# Altium PCB TESTER_REMOTE_02.PcbDoc (part 1 of 2)
Units mil, origin at the board's own origin, x right, y up, seen from the top; angles counter-clockwise.
Board outline 6191.28 x 3341.28 mil, 2 copper layers (Top Layer, Bottom Layer); 123 components, 81 nets, 444 pads, 73 vias.
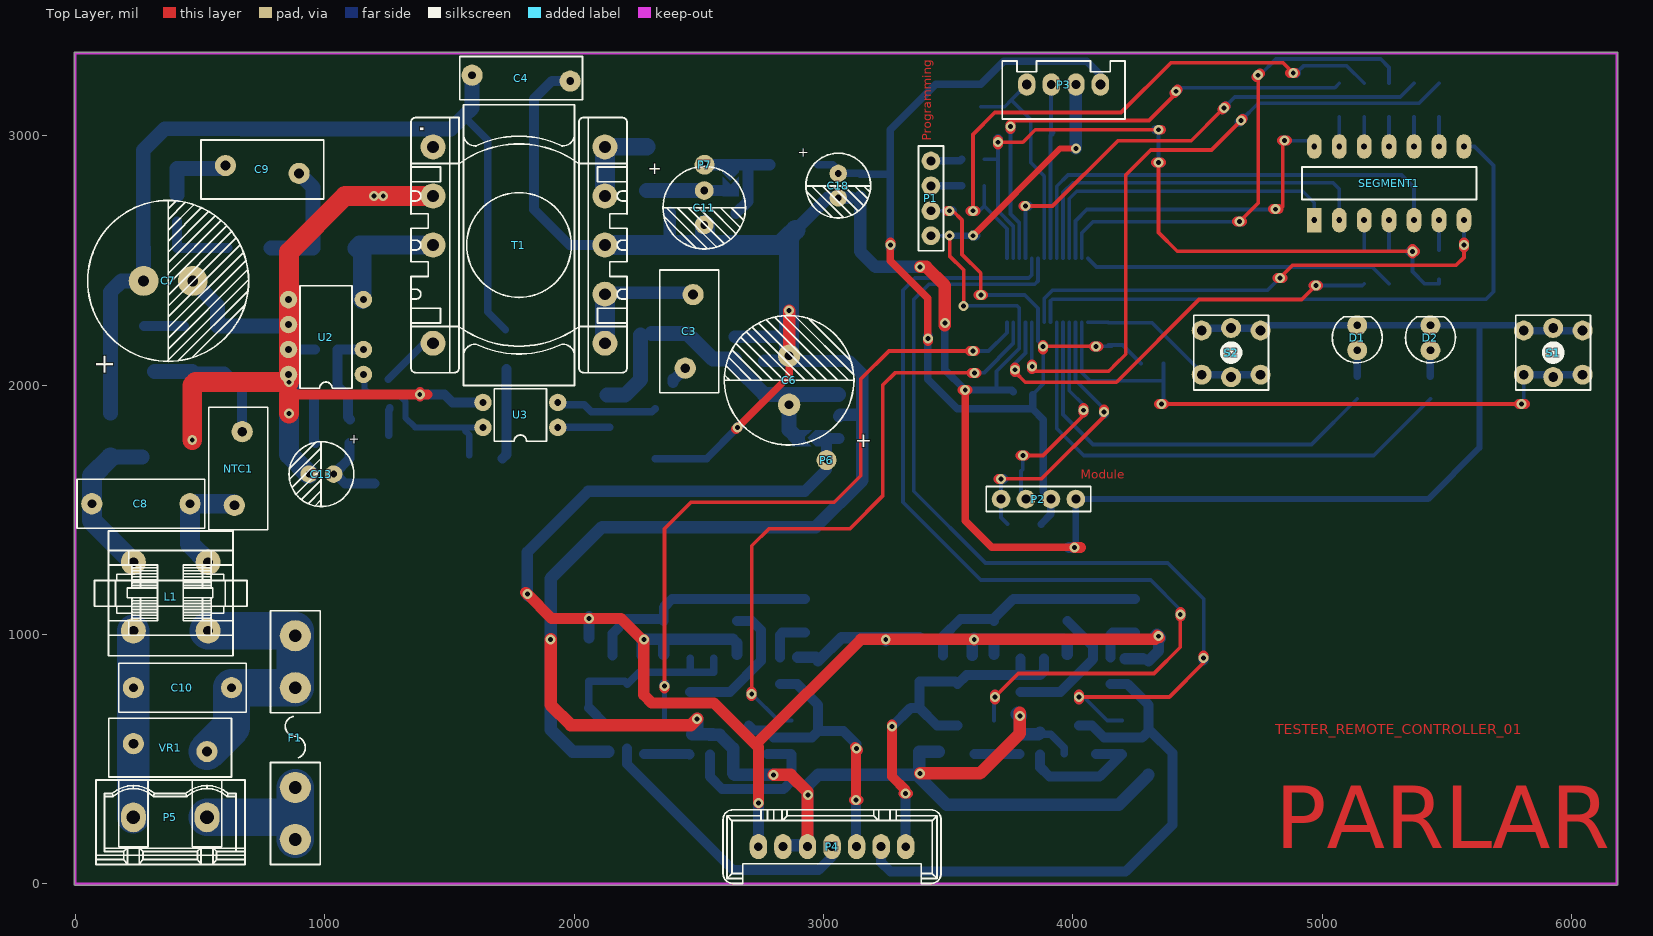
[diagram p0: Top Layer view]
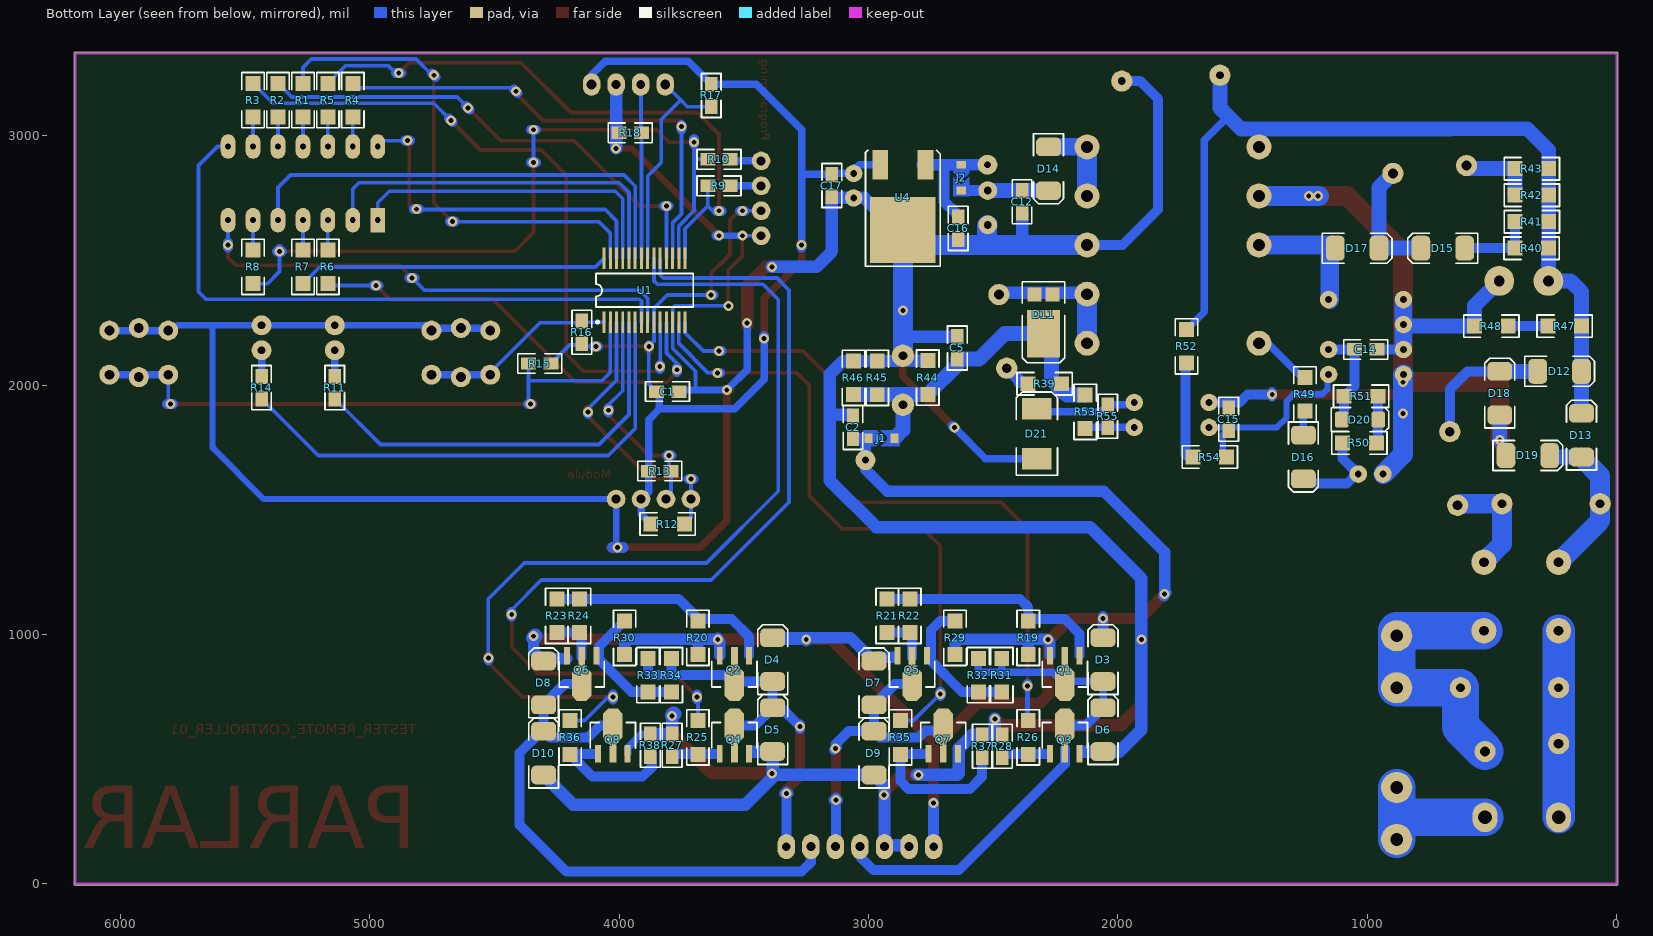
[diagram p1: Bottom Layer view, seen from below]

## Layer stack, top to bottom
Top Solder: solder mask 0.4, Solder Resist, Dk 3.5
Top Layer: signal copper 1.4
Dielectric 1: dielectric 12.6, FR-4, Dk 4.8
Bottom Layer: signal copper 1.4
Bottom Solder: solder mask 0.4, Solder Resist, Dk 3.5

## Board outline
-5.02,0 -5.02,3331.25 cw(c0,3331.25) 0,3336.26 6181.25,3336.26 cw(c6181.25,3331.25) 6186.26,3331.25 6186.26,0 cw(c6181.25,0) 6181.25,-5.01 0,-5.01 cw(c0,0)

## Design rules (kind name [scope] priority, off if disabled: settings)
AssemblyTestPointUsage [All] p1 off:
AssemblyTestpoint [All] p1 off: testpointundercomponent=TRUE minsize=40 maxsize=100 preferedsize=60 minholesize=0 maxholesize=40 preferedholesize=32 testpointgrid=1 usegrid=TRUE gridtolerance=0.01 allowsidetop=TRUE allowsidebottom=TRUE
Clearance Keep [OnLayer('Keep-Out Layer')] p1: gap=10 ignorepadtopadclearanceinfootprint=FALSE except(0: Arc-Hole Track-Hole SMDPad-Hole THPad-Hole Via-Hole Fill-Hole Poly-Hole Region-Hole Text-Hole)
Clearance "OTHER - OTHER" [NOT((InNetClass('220') OR InNetClass('Hline') OR InNetClass('HVDC') OR InNetClass('MV') OR InNet('DCLINK-'))) vs NOT((InNetClass('220') OR InNetClass('Hline') OR InNetClass('HVDC') OR InNetClass('MV') OR InNet('DCLINK-')))] p2: gap=10 ignorepadtopadclearanceinfootprint=FALSE
Clearance "DCL- - OTHER" [InNet('DCLINK-') vs NOT((InNetClass('220') OR InNetClass('Hline') OR InNetClass('HVDC') OR InNetClass('MV') OR InNet('DCLINK-')))] p3: gap=150 ignorepadtopadclearanceinfootprint=FALSE except(0: Arc-Hole Track-Hole SMDPad-Hole THPad-Hole Via-Hole Fill-Hole Poly-Hole Region-Hole Text-Hole)
Clearance MV-OTHER [InNetClass('MV') vs NOT((InNetClass('220') OR InNetClass('Hline') OR InNetClass('HVDC') OR InNetClass('MV') OR InNet('DCLINK-')))] p4: gap=150 ignorepadtopadclearanceinfootprint=FALSE except(0: Arc-Hole Track-Hole SMDPad-Hole THPad-Hole Via-Hole Fill-Hole Poly-Hole Region-Hole Text-Hole)
Clearance MV-DCL- [InNetClass('MV') vs InNet('DCLINK-')] p5: gap=35 ignorepadtopadclearanceinfootprint=FALSE except(0: Arc-Hole Track-Hole SMDPad-Hole THPad-Hole Via-Hole Fill-Hole Poly-Hole Region-Hole Text-Hole)
Clearance MV-MV [InNetClass('MV') vs InNetClass('MV')] p6: gap=25 ignorepadtopadclearanceinfootprint=FALSE except(0: Arc-Hole Track-Hole SMDPad-Hole THPad-Hole Via-Hole Fill-Hole Poly-Hole Region-Hole Text-Hole)
Clearance HLINE-OTHER [InNetClass('Hline') vs NOT((InNetClass('220') OR InNetClass('Hline') OR InNetClass('HVDC') OR InNetClass('MV') OR InNet('DCLINK-')))] p7: gap=150 ignorepadtopadclearanceinfootprint=FALSE except(0: Arc-Hole Track-Hole SMDPad-Hole THPad-Hole Via-Hole Fill-Hole Poly-Hole Region-Hole Text-Hole)
Clearance HLINE-MV [InNetClass('Hline') vs InNetClass('MV')] p8: gap=35 ignorepadtopadclearanceinfootprint=FALSE except(0: Arc-Hole Track-Hole SMDPad-Hole THPad-Hole Via-Hole Fill-Hole Poly-Hole Region-Hole Text-Hole)
Clearance HLINE-HLINE,DCL- [InNetClass('Hline') vs (InNetClass('Hline') OR InNet('DCLINK-'))] p9: gap=25 ignorepadtopadclearanceinfootprint=FALSE except(0: Arc-Hole Track-Hole SMDPad-Hole THPad-Hole Via-Hole Fill-Hole Poly-Hole Region-Hole Text-Hole)
Clearance 220-OTHER [InNetClass('220') vs NOT((InNetClass('220') OR InNetClass('Hline') OR InNetClass('HVDC') OR InNetClass('MV') OR InNet('DCLINK-')))] p10: gap=150 ignorepadtopadclearanceinfootprint=FALSE except(0: Arc-Hole Track-Hole SMDPad-Hole THPad-Hole Via-Hole Fill-Hole Poly-Hole Region-Hole Text-Hole)
Clearance 220-220,HVDC,MV,HLINE [InNetClass('220') vs (InNetClass('220') OR InNetClass('Hline') OR InNetClass('HVDC') OR InNetClass('MV') OR InNet('DCLINK-'))] p11: gap=100 ignorepadtopadclearanceinfootprint=FALSE except(0: Arc-Hole Track-Hole SMDPad-Hole THPad-Hole Via-Hole Fill-Hole Poly-Hole Region-Hole Text-Hole)
Clearance HVDC-OTHER [InNetClass('HVDC') vs NOT(InNetClass('220') OR InNetClass('Hline') OR InNetClass('HVDC') OR InNetClass('MV') OR InNet('DCLINK-'))] p12: gap=150 ignorepadtopadclearanceinfootprint=FALSE except(0: Arc-Hole Track-Hole SMDPad-Hole THPad-Hole Via-Hole Fill-Hole Poly-Hole Region-Hole Text-Hole)
Clearance HVDC-220,HLINE,MV,DCL- [InNetClass('HVDC') vs ((InNetClass('220') OR InNetClass('Hline') OR InNetClass('MV') OR InNet('DCLINK-')))] p13: gap=75 ignorepadtopadclearanceinfootprint=FALSE except(0: Arc-Hole Track-Hole SMDPad-Hole THPad-Hole Via-Hole Fill-Hole Poly-Hole Region-Hole Text-Hole)
Clearance HVDC-HVDC [InNetClass('HVDC') vs InNetClass('HVDC')] p14: gap=60 ignorepadtopadclearanceinfootprint=FALSE except(0: Arc-Hole Track-Hole SMDPad-Hole THPad-Hole Via-Hole Fill-Hole Poly-Hole Region-Hole Text-Hole)
Clearance Clearance_9 [InPolygon] p15: gap=20 ignorepadtopadclearanceinfootprint=FALSE except(0: Arc-Hole Track-Hole SMDPad-Hole THPad-Hole Via-Hole Fill-Hole Poly-Hole Region-Hole Text-Hole)
ComponentClearance [All] p1 off: gap=10 collisioncheckmode=3 verticalgap=10 showdistances=FALSE
FabricationTestPointUsage TestPointUsage [All] p1 off: valid=0 allowmultiple=FALSE
FabricationTestpoint Testpoint [All] p1 off: side=3 testpointundercomponent=TRUE minsize=40 maxsize=100 preferedsize=60 minholesize=0 maxholesize=40 preferedholesize=32 testpointgrid=1 allowsidetop=TRUE allowsidebottom=TRUE usegrid=TRUE gridtolerance=0.01
Height [All] p1 off: minheight=0 maxheight=3937.01 prefheight=500
HoleSize [All] p1 off: absolutevalues=TRUE maxlimit=275.59 minlimit=0 maxpercent=80.000 minpercent=20.000
HoleToHoleClearance [All] p1 off: gap=10 allowstackedmicrovias=TRUE
LayerPairs [All] p1 off: enforce=TRUE
MinimumSolderMaskSliver [All] p1 off: minsoldermaskwidth=10
NetAntennae [All] p1 off: netantennaetolerance=0
PolygonConnect [All] p1: connectstyle=Direct reliefconductorwidth=10 reliefentries=4 polygonreliefangle="90 Angle" airgapwidth=10
RoutingVias [All] p1: holewidth=28 width=50 viastyle="Through Hole" minholewidth=0 minwidth=0 maxholewidth=100 maxwidth=200
SilkToSilkClearance [All] p1 off: silktosilkclearance=10
SilkToSolderMaskClearance [IsPad] p1 off: minsilkscreentomaskgap=10 clearancetoexposedcopper=TRUE
SolderMaskExpansion [All] p1: expansion=4
Width [All] p1: maxlimit=500 minlimit=8 preferedwidth=15
17 further rules are at their usual default settings.

## Classes and differential pairs
net class MV: NetC9_1 NetC9_2 NetD15_1 NetR47_1 NetR52_1
net class HVDC: DCLINK+ DRAIN
net class Hline: BIAS BP/M EN/UV NetD16_1 NetD20_2 NetR49_2
net class 220: NetC8_1 NetC8_2 NetD12_1 NULL PHASE PHASE_IN
component class TESTER_REMOTE_SWITCHING_02: C3 C4 C5 C6 C7 C8 C9 C10 C11 C12 C13 C14 C15 C16 C17 C18 C? D11 D12 D13 D14 D15 D16 D17 D18 D19 D20 D21 D? DZ2 F1 J1 J2 J? L1 NTC1 P5 P6 P7 P8 P10 P11 P12 P? R39 R40 R41 R42 R43 R44 R45 R46 R47 R48 R49 R50 R51 R52 R53 R54 R55 R? SW1 T1 U2 U3 U4 U5 U? VR1
component class TESTER_REMOTE_STEPPER_DRIVER_02: C2 D3 D4 D5 D6 D7 D8 D9 D10 P4 Q1 Q2 Q3 Q4 Q5 Q6 Q7 Q8 R19 R20 R21 R22 R23 R24 R25 R26 R27 R28 R29 R30 R31 R32 R33 R34 R35 R36 R37 R38
component class TESTER_REMOTE_CONTROLLER_02: C1 D1 D2 P1 P2 P3 R1 R2 R3 R4 R5 R6 R7 R8 R9 R10 R11 R12 R13 R14 R15 R16 R17 R18 S1 S2 SEGMENT1 U1

## Components (designator, comment, footprint, x,y, rotation, side; value= is the part's Value field where it differs from the comment)
C1 "100nF" "SMD 0805" 3806.25,1975 r180 bottom
C2 "100nF" "SMD 0805" 3062.5,1831.25 r90 bottom
C3 "27pF-CP-1KV" "VDR D10 P7.5" 2445.93,2068.75 r270 top
C4 "2.2nF-X1Y1-250VAC" "VDR D10 P10" 1984.6,3220.13 r0 top
C5 "100nF" "SMD 0805" 2643.75,2150 r90 bottom
C6 "1000uF-35V" "CAP EL D13 P5" 2862.5,1921.9 r90 top
C7 "22uF-400V" "CAP EL D16 P5" 372.15,2418.75 r0 top
C8 "100nF-MKP-X2-305VAC" "CAP RAD X13 Y5 P10" 459.65,1525 r180 top
C9 "10nF-CP-1KV" "VDR D10 P7.5" 601.87,2881.5 r180 top
C10 "100nF-MKP-X2-305VAC" "CAP RAD X13 Y5 P10" 626.13,787.16 r180 top
C11 "470uF-25V" "CAP EL D08 P3.5" 2522.15,2781.25 r270 top
C12 "100nF" "SMD 0805" 2384.65,2736.25 r270 bottom
C13 "1uF-50V" "CAP EL D06.3 P2.5" 1035.93,1643.75 r180 top
C14 "100nF" "SMD 0805" 1006.25,2143.75 r180 bottom
C15 "1nF" "SMD 0805" 1556.25,1863.75 r90 bottom
C16 "100nF" "SMD 0805" 2640.9,2629.4 r270 bottom
C17 "100nF" "SMD 0805" 3147.15,2801.25 r270 bottom
C18 "100uF-16V" "CAP EL D06.3 P2.5" 3059.65,2850 r270 top
D1 "LED_BLUE" "LED 5MM" 5140.9,2190.75 r90 top
D2 "LED_RED" "LED 5MM" 5434.65,2190.75 r90 top
D3 "UF4007" "SMD SMA" 2059.65,900 r90 bottom
D4 "UF4007" "SMD SMA" 3384.65,900 r90 bottom
D5 "UF4007" "SMD SMA" 3384.65,619 r90 bottom
D6 "UF4007" "SMD SMA" 2059.65,619 r90 bottom
D7 "UF4007" "SMD SMA" 2978.4,806.25 r90 bottom
D8 "UF4007" "SMD SMA" 4303.4,806.25 r90 bottom
D9 "UF4007" "SMD SMA" 2978.4,525 r90 bottom
D10 "UF4007" "SMD SMA" 4303.4,525 r90 bottom
D11 "PDS4150" "SMD POWERDI 5" 2306.66,2276.43 r270 bottom
D12 "1N4007" "SMD SMA" 228.7,2056.25 r180 bottom
D13 "1N4007" "SMD SMA" 140.95,1800.25 r90 bottom
D14 "UF4007" "SMD SMA" 2278.4,2868.5 r270 bottom
D15 "SMAJ150A" "SMD SMA" 697.15,2550 r0 bottom
D16 "UF4007" "SMD SMA" 1256.25,1712.5 r270 bottom
D17 "UF4007" "SMD SMA" 1040.65,2550 r180 bottom
D18 "1N4007" "SMD SMA" 468.66,1968.5 r90 bottom
D19 "1N4007" "SMD SMA" 355.91,1718.75 r180 bottom
D20 "1N5255B-28V" "SMD MINIMELF SOD80" 1029.25,1862.5 r180 bottom
D21 "ZM4748A-22V" "SMD DO-41" 2325,1806.25 r90 bottom
F1 "FUSE 3.15A-250V-FAST" "FUSE P5.3MM H1.3MM" 882.04,178.49 r90 top
J1 "JUNCTION PAD" "PAD JUNCTION" 2896.6,1787.7 r0 bottom
J2 "JUNCTION PAD" "PAD JUNCTION" 2628.4,2781.25 r90 bottom
L1 "?" "CH CCSP" 532.43,1015.5 r90 top
NTC1 "10R11MM" "VDR D10 P7.5" 637.5,1518.75 r270 top
P1 "CON PIN HEADER 1*40" "CON HDR 2.54FM 4" 3431.25,2600 r90 top
P2 "I2C_MODUlE" "CON HDR 2.54FM 4" 3712.5,1543.75 r0 top
P3 "CONNECTOR 4" "CON XH 4" 3815.65,3206.25 r0 top
P4 "CONNECTOR_MKS_1857" "CON MKS1857 7" 3329.92,150 r180 top
P5 "PHONIX_WF855-7.62" "CON PHOENIX2 7.5 2" 527.71,267.47 r180 top
P6 "CONNECTOR 1" "PAD TEST"#1 3012.5,1700 r0 top
P7 "CONNECTOR 1" "PAD TEST"#2 2523.28,2888.39 r0 top
Q1 "BCX52" "SMD SOT89 TRANSISTOR" 2213.09,858.81 r0 bottom
Q2 "BCX52" "SMD SOT89 TRANSISTOR" 3538.09,858.81 r0 bottom
Q3 "BCX55" "SMD SOT89 TRANSISTOR" 2213.09,579.19 r180 bottom
Q4 "BCX55" "SMD SOT89 TRANSISTOR" 3538.09,579.19 r180 bottom
Q5 "BCX52" "SMD SOT89 TRANSISTOR" 2825.59,858.56 r0 bottom
Q6 "BCX52" "SMD SOT89 TRANSISTOR" 4150.59,858.56 r0 bottom
Q7 "BCX55" "SMD SOT89 TRANSISTOR" 2700.59,578.94 r180 bottom
Q8 "BCX55" "SMD SOT89 TRANSISTOR" 4025.59,578.94 r180 bottom
R1 "330R" "SMD 1206" 5268.75,3143.75 r270 bottom
R2 "330R" "SMD 1206" 5368.75,3143.75 r90 bottom
R3 "330R" "SMD 1206" 5468.75,3143.75 r270 bottom
R4 "330R" "SMD 1206" 5068.75,3143.75 r90 bottom
R5 "330R" "SMD 1206" 5168.75,3143.75 r90 bottom
R6 "330R" "SMD 1206" 5168.75,2475 r90 bottom
R7 "330R" "SMD 1206" 5268.75,2475 r90 bottom
R8 "330R" "SMD 1206" 5468.75,2475 r90 bottom
R9 "1K" "SMD 0805" 3600,2800 r180 bottom
R10 "1K" "SMD 0805" 3600,2906.25 r180 bottom
R11 "330R" "SMD 0805" 5140.9,1990.75 r90 bottom
R12 "10K" "SMD 1206" 3806.25,1443.75 r0 bottom
R13 "10K" "SMD 0805" 3837.5,1656.25 r0 bottom
R14 "330R" "SMD 0805" 5434.65,1990.75 r90 bottom
R15 "10K" "SMD 0805" 4318.75,2087.5 r180 bottom
R16 "10K" "SMD 0805" 4150,2212.5 r270 bottom
R17 "10K" "SMD 0805" 3631.25,3162.5 r270 bottom
R18 "10K" "SMD 0805" 3956.25,3012.5 r0 bottom
R19 "10K" "SMD 1206" 2359.65,987.5 r270 bottom
R20 "10K" "SMD 1206" 3684.65,987.5 r270 bottom
R21 "1K" "SMD 1206" 2925.59,1075.25 r90 bottom
R22 "1K" "SMD 1206" 2834.65,1075.25 r90 bottom
R23 "1K" "SMD 1206" 4250.59,1075.25 r90 bottom
R24 "1K" "SMD 1206" 4159.65,1075.25 r90 bottom
R25 "330R" "SMD 1206" 3684.65,587.75 r90 bottom
R26 "330R" "SMD 1206" 2359.65,587.75 r90 bottom
R27 "10K" "SMD 0805" 3788.14,556.25 r270 bottom
R28 "10K" "SMD 0805" 2463.14,552.75 r270 bottom
R29 "10K" "SMD 1206" 2653.4,987.5 r270 bottom
R30 "10K" "SMD 1206" 3978.4,987.5 r270 bottom
R31 "1K" "SMD 1206" 2465.9,837.75 r270 bottom
R32 "1K" "SMD 1206" 2559.65,837.75 r270 bottom
R33 "1K" "SMD 1206" 3884.65,837.75 r270 bottom
R34 "1K" "SMD 1206" 3790.9,837.75 r270 bottom
R35 "330R" "SMD 1206" 2872.15,587.75 r90 bottom
R36 "330R" "SMD 1206" 4197.15,587.75 r90 bottom
R37 "10K" "SMD 0805" 2544.39,552.75 r270 bottom
R38 "10K" "SMD 0805" 3875,556.25 r270 bottom
R39 "390R" "SMD 1206" 2293.75,2006.25 r180 bottom
R40 "2.2K" "SMD 1206" 340.9,2550 r180 bottom
R41 "2.2K" "SMD 1206" 339.65,2656.25 r180 bottom
R42 "200R" "SMD 1206" 339.65,2762.5 r180 bottom
R43 "200R" "SMD 1206" 339.65,2868.75 r180 bottom
R44 "6.34K" "SMD 1206" 2762.5,2031.25 r90 bottom
R45 "6.34K" "SMD 1206" 2965.35,2029.75 r90 bottom
R46 "6.34K" "SMD 1206" 3060.8,2030 r90 bottom
R47 "470K" "SMD 1206" 208.45,2237.5 r180 bottom
R48 "470K" "SMD 1206" 502.15,2237.5 r180 bottom
R49 "47R" "SMD 1206" 1250,1963.75 r90 bottom
R50 "47R" "SMD 1206" 1031.25,1768.75 r180 bottom
R51 "21K-1%" "SMD 1206" 1025,1956.25 r0 bottom
R52 "4.3M" "SMD 1206" 1725,2156.25 r90 bottom
R53 "680R" "SMD 1206" 2131.25,1893.75 r90 bottom
R54 "3.9M" "SMD 1206" 1631.25,1712.5 r0 bottom
R55 "1K" "SMD 0805" 2040.9,1876.25 r270 bottom
S1 "SWITCH PUSH" "SW 6X6" 5926.89,2131.25 r90 top
S2 "SWITCH PUSH" "SW 6X6" 4635.26,2131.25 r90 top
SEGMENT1 "S1" 7SEG_6DIGIT 4470.44,3027.78 r0 top
T1 "TRANS SD36" "TR EC28/20 VER 5+5" 1434.65,2956.25 r270 top
U1 "BS66F340C" "SMD IC SSOP28-HOLTEK" 3898.48,2381.25 r180 bottom
U2 "TNY278" DIP8 1154.83,2043.75 r90 top
U3 "PC817A-GN" DIP4 1934.65,1831.25 r90 top
U4 "78L05" "SMD DPAK" 2862.7,2753.74 r0 bottom
VR1 "VDR-10D471" "VDR D10 P7.5" 232.43,562.75 r180 top

## Footprints (in the part's own frame and the unit in brackets; to place one, negate y for a bottom-side part, rotate by r counter-clockwise, add the part's x,y. Pads: shape width x height; smd on the part's side, far side on the other; paste and mask are expansions set on the pad)
7SEG_6DIGIT [mm]
  oval 1.5x2.5 hole 0.6: 1(12.657,-1.778) 2(15.197,-1.778) 3(17.737,-1.778) 4(20.277,-1.778) 5(22.817,-1.778) 6(25.357,-1.778) 7(27.897,-1.778) 9(15.197,-9.278) 10(17.737,-9.278) 11(20.277,-9.278) 12(22.817,-9.278) 13(25.357,-9.278) 14(27.897,-9.278)
  rect 1.5x2.5 hole 0.6: 8(12.657,-9.278)
  silkscreen extent 11.39,-7.19 29.17,-3.86, body extent 0,-11.1 41.16,0, height 6.1
"CAP EL D06.3 P2.5" [mil] "PITCH:2.5MM D:6.3MM"
  round 70 hole 27.56: 1(0,0) 2(98.43,0)
  silkscreen extent -81,-130 179,130, body extent -83,-134 185,134, height 492
"CAP EL D08 P3.5" [mm] "PITCH:3.5MM D:8MM"
  round 1.905 hole 0.8: 1(0,0) 2(3.5,0)
  silkscreen extent -2.45,-4.2 5.95,4.2, body extent -2.5,-4.32 6,4.17, height 17.5
"CAP EL D13 P5" [mil] "PITCH:5MM D:13MM"
  round 90 hole 35.43: 1(0,0) 2(196.85,0)
  silkscreen extent -161,-260 358,260, body extent -157,-256 354,256, height 1063
"CAP EL D16 P5" [mil] "PITCH:7.5MM D:16MM"
  round 120 hole 43.31: 1(-98.43,0) 2(98.43,0)
  silkscreen extent -323,-323 323,323, body extent -326,-324 324,326, height 1030
"CAP RAD X13 Y5 P10" [mil] "X:13MM Y:5MM PITCH:10MM H:12MM"
  round 85 hole 35.43: 1(0,0) 2(393.7,0)
  silkscreen extent -59,-98 453,98, body extent -59,-101 453,96, height 453
"CH CCSP" [mm] "LINE FILTER"
  oval 2.6x2.54 hole 1: 1(0,0) 2(6.985,0) 3(0,7.62) 4(6.985,7.62)
  silkscreen extent -2.54,-3.97 10.16,11.59, body extent -1.97,-3.79 8.73,11.91, height 19.8
"CON HDR 2.54FM 4" [mm] "CONNECTOR PTCH:2.54MM"
  round 1.905 hole 0.9: 1(0,0) 2(2.54,0) 3(5.08,0) 4(7.62,0)
  silkscreen extent -1.52,-1.27 9.14,1.27, body extent -1.5,-1.24 9.16,1.26, height 5
"CON MKS1857 7" [mm] "CONNECTOR PITCH:2.5MM"
  oval 1.778x2.54 hole 0.85: 1(0,0) 7(15,0)
  oval 1.778x2.54 hole 0.9: 2(2.5,0) 3(5,0) 4(7.5,0) 5(10,0) 6(12.5,0)
  silkscreen extent -3.6,-3.75 18.6,3.75, body extent -3.6,-3.71 18.6,3.8, height 23.3
"CON PHOENIX2 7.5 2" [mm] "CONNECTOR PITCH:7.5MM"
  oval 2.54x3.048 hole 1.4: 1(0,0) 2(7.5,0)
  silkscreen extent -3.87,-3.8 11.32,4.8, body extent -3.89,-3.75 11.35,4.85, height 12
"CON XH 4" [mil] "CONNECTOR PITCH:2.5MM"
  oval 70x90 hole 39.37: 1(0,0) 4(295.28,0)
  oval 70x90 hole 35.43: 2(98.43,0) 3(196.85,0)
  silkscreen extent -98,-138 394,94, body extent -94,-138 394,89, height 276
DIP4 [mil] "DIP4"
  round 70 hole 27.56: 1(0,0) 2(100,0) 3(100,300) 4(0,300)
  silkscreen extent -56,46 156,254, body extent -59,-7 159,307, height 170
DIP8 [mil] "DIP8"
  round 70 hole 27.56: 1(0,0) 2(100,0) 4(300,0) 5(300,300) 6(200,300) 7(100,300) 8(0,300)
  silkscreen extent -56,46 356,254, body extent -65,-5 365,305, height 200
"FUSE P5.3MM H1.3MM" [mm] "FUSE"
  round 3.175 hole 1.3: 1(0,0) 1(5.3,0) 2(15.46,0) 2(20.76,0)
  silkscreen extent -2.54,-2.54 23.3,2.54, body extent -0.64,-3.99 21.36,4.01, height 13.9
"LED 5MM" [mil] "LED"
  round 80 hole 31.5: 1(-50,0) 2(50,0)
  silkscreen extent -100,-100 84,100
"PAD JUNCTION" [mm] "PAD JUNCTION"
  rect 0.8x1 smd: 1(0,0) 2(2.626,0.005)
  Top Layer region: -0.564,0.818 1.41,0.818 0.592,-0.001 1.424,-0.833 -0.564,-0.833
  Top Layer region: 1.007,-0.039 1.859,0.813 3.195,0.813 3.195,-0.808 1.776,-0.808
"PAD TEST"#1 [mil] "PAD TEST"
  round 80 hole 27.56: 1(0,0)
"PAD TEST"#2 [mil] "PAD TEST"
  round 80 hole 27.56: 1(0,-3.74)
"SMD 0805" [mil] "SMD 0805"
  round 27.56 on Mech2: 0(0,0)
  rect 60x50 smd: 1(-45,0) 2(45,0)
  silkscreen extent -88,-39 88,39, body extent -57,-28 61,27, height 21
"SMD 1206" [mil] "SMD 1206"
  round 27.56 on Mech2: 0(0,0)
  rect 60x60 smd: 1(-67.5,0) 2(67.5,0)
  silkscreen extent -111,-45 111,45, body extent -66,-34 66,34, height 33
"SMD DO-41" [mm] "SMD DO-41"
  round 2 on Mech2: 0(0,0)
  rect 2.2x3 smd: 1(-2.54,0) 2(2.54,0)
  silkscreen extent -4.24,-2.11 4.24,2.11, body extent -2.4,-1.3 2.4,1.3, height 2.6
"SMD DPAK" [mm] "SMD DPAK"
  round 1.2 on Mech2: 0(-2.3,-0.925) 0(0,-1.175) 0(2.3,-0.925)
  rect 1.6x3 smd: 1(-2.3,-3.325) 3(2.3,-3.325)
  rect 6.7x6.7 smd: 2(0,3.325)
  silkscreen extent -3.81,-4.8 3.81,7.01, body extent -3.23,-3.59 3.27,5.11, height 2.3
"SMD IC SSOP28-HOLTEK" [mm] "SSOP, 28-Leads , Pitch 0.635mm"
  oval 1x3 on Mech2: 0(-4.522,0) 0(4.522,0)
  rect 0.3x2.2 smd: 1(-4.127,-3.25) 2(-3.492,-3.25) 3(-2.857,-3.25) 4(-2.222,-3.25) 5(-1.587,-3.25) 6(-0.952,-3.25) 7(-0.317,-3.25) 8(0.318,-3.25) 9(0.953,-3.25) 10(1.588,-3.25) 11(2.223,-3.25) 12(2.858,-3.25) 13(3.493,-3.25) 14(4.128,-3.25) 15(4.128,3.25) 16(3.493,3.25) 17(2.858,3.25) 18(2.223,3.25) 19(1.588,3.25) 20(0.953,3.25) 21(0.318,3.25) 22(-0.317,3.25) 23(-0.952,3.25) 24(-1.587,3.25) 25(-2.222,3.25) 26(-2.857,3.25) 27(-3.492,3.25) 28(-4.127,3.25)
  round 1.5 on Mech2: 3(-2.261,0) 3(0,0) 3(2.261,0)
  silkscreen extent -4.95,-3.37 4.95,1.7, body extent -4.95,-3.04 4.95,2.96, height 1.75
"SMD MINIMELF SOD80" [mil] "SMD MINI MELF"
  round 51.18 on Mech2: 0(0,0)
  rrect30% 54x64 smd: 1(-73,0) 2(73,0)
  silkscreen extent -116,-47 116,47, body extent -68,-30 74,30, height 59
"SMD POWERDI 5" [mm] "SMD POWERDI 5"
  round 0.8 on Mech2: 0(-1.095,-0.711) 0(-1.095,1.129)
  rect 1.4x1.39 smd: 1(-2.225,-0.711) 1(-2.225,1.129)
  rect 4.86x3.36 smd: 2(1.757,0.209)
  silkscreen extent -3.53,-1.97 4.72,2.38, body extent -2.82,-1.8 3.78,2.25, height 1.17
"SMD SMA" [mm] "SMD SMA"
  round 2 on Mech2: 0(0,0)
  rrect50% 1.905x2.54 smd: 1(-2.229,0) 2(2.229,0)
  silkscreen extent -3.56,-1.52 3.56,1.52, body extent -2.8,-1.48 2.8,1.47, height 2.7
"SMD SOT89 TRANSISTOR" [mm] "SMD SOT89"
  round 0.8 on Mech2: 0(-1.5,-0.1) 0(1.5,-0.1)
  rect 0.6x1.8 smd: 1(-1.5,-1.45) 2(1.5,-1.45)
  rect 0.7x2.2 smd: 3(0,-1.25)
  oct 2x3.4 smd: 3(0,1.45)
  silkscreen extent -2.3,-0.85 2.3,1.75, body extent -2.29,-1.72 2.31,2.48, height 1.55
"SW 6X6" [mm] "SWITCH"
  round 2.032 hole 1: 1(-2.5,0) 1(-2.25,3) 1(-2.25,-3) 2(2.25,3) 2(2.25,-3) 2(2.5,0)
  silkscreen extent -3.81,-3.81 3.81,3.81, body extent -3.05,-4.17 2.95,4.19, height 9
"TR EC28/20 VER 5+5" [mm] "transformer"
  round 2.54 hole 1.2: 1(0,0) 2(5,0) 3(10,0) 5(20,0) 6(20,17.5) 7(15,17.5) 8(10,17.5) 9(5,17.5) 10(0,17.5)
  silkscreen extent -4.3,-2.25 24.3,19.75, body extent -4.29,-2.21 24.31,19.79, height 21
"VDR D10 P7.5" [mil] "voltage-dependent resistor"
  round 85 hole 39.37: 1(0,0) 2(-295.28,31.5)
  silkscreen extent -394,-102 98,134, body extent -394,-103 98,133, height 522
"VDR D10 P10" [mil] "voltage-dependent resistor"
  round 85 hole 31.5: 1(0,0) 2(-393.7,23.62)
  silkscreen extent -443,-75 49,98, body extent -443,-75 49,99, height 522

## Part data
C1 C2 C3 C4 C5 C8 C9 C10 C12 C14 C15 C16 C17: library part CAP, "Capacitor", LatestRevisionDate=17-Jul-2002, LatestRevisionNote="Re-released for DXP Platform.", PackageDescription="Radial Cap, Thru-Hole; 2 Leads; 0.3 in Pin Spacing", PackageReference=RAD-0.3, Published=8-Jun-2000, Publisher="Altium Limited"
C6 C7 C11 C13 C18: library part "CAP POL", "Capacitor  Polarized", PackageDescription="Capacitor; 2 Leads", PackageReference=CAPR5-4X5, Published=23-Sep-2002, Publisher="Altium Limited"
D1 D2: library part LED, "Typical INFRARED GaAs LED", LatestRevisionDate=08-Jul-2005, LatestRevisionNote="Mech Layer 1 removed.", PackageDescription="LED; 2 Leads", PackageReference=LED-0, Published=8-Jun-2000, Publisher="Altium Limited"
D3 D4 D5 D6 D7 D8 D9 D10 D12 D13 D14 D16 D17 D18 D19: library part DIODE, "Typical Diode"
D11: library part "DIODE SCHOTTKY", "Schottky Diode"
D15 D20 D21: library part "DIODE ZENER", "Zener Diode"
F1: library part FUSE, "Fuse", LatestRevisionDate=17-Jul-2002, LatestRevisionNote="Re-released for DXP Platform.", PackageDescription="Thru-Hole; 2 Leads", PackageReference=PIN-W2/E2.8, Published=8-Jun-2000, Publisher="Altium Limited"
J1 J2: library part "RES JUNCTION", "Resistor", LatestRevisionDate=17-Jul-2002, LatestRevisionNote="Re-released for DXP Platform.", PackageDescription="Axial Device, Thru-Hole; 2 Leads; 0.4 in Pin Spacing", PackageReference=AXIAL-0.4, Published=8-Jun-2000, Publisher="Altium Limited"
L1: library part "EMI FILTER"
NTC1: library part "RES VARISTOR", "Varistor (Voltage-Sensitive Resistor)", Code_IPC=RESC2012, LatestRevisionDate=29-May-2009, LatestRevisionNote="IPC-7351 Footprint Added.", PackageDescription="Chip Resistor 0805 Case Size", PackageReference=6-0805, PackageVersion=Mar-2003, Published=24-Mar-1999, Publisher="Altium Limited"
P1 P2: library part "CONNECTOR 4", "Header, 4-Pin", LatestRevisionDate=17-Jul-2002, LatestRevisionNote="Re-released for DXP Platform.", Publisher="Altium Limited"
P3: "Header, 4-Pin", LatestRevisionDate=17-Jul-2002, LatestRevisionNote="Re-released for DXP Platform.", Publisher="Altium Limited"
P4: library part "CONNECTOR 7", "Header, 7-Pin", LatestRevisionDate=17-Jul-2002, LatestRevisionNote="Re-released for DXP Platform.", Publisher="Altium Limited"
P5: library part "CONNECTOR 2", "Header, 2-Pin", LatestRevisionDate=17-Jul-2002, LatestRevisionNote="Re-released for DXP Platform.", Publisher="Altium Limited"
P6 P7: "The BS81x is a series of 2~16 key touch key devices", LatestRevisionDate=17-Jul-2002, LatestRevisionNote="Re-released for DXP Platform.", Publisher="Altium Limited"
Q1 Q2 Q5 Q6: library part "Q PNP", "PNP Bipolar Transistor", LatestRevisionDate=29-May-2009, LatestRevisionNote="IPC-7351 Footprint Added.", PackageDescription="3-Pin SOT-23 Package 0.95 mm Pitch, 2.4 mm Lead Span", PackageReference=SOT-23B, PackageVersion=Aug-1999, Published=8-Jun-2000, Publisher="Altium Limited"
Q3 Q4 Q7 Q8: library part "Q NPN", "NPN Bipolar Transistor", Code_JEDEC=TO-226-AA, LatestRevisionDate=17-Jul-2002, LatestRevisionNote="Re-released for DXP Platform.", PackageDescription="TO, Flat Index; 3 In-Line, Axial Leads; Body Dia. 4.8mm; Leads 0.55 x 0.51 mm (max)", PackageReference=TO-226-AA, Published=8-Jun-2000, Publisher="Altium Limited"
R1 R2 R3 R4 R5 R6 R7 R8 R9 R10 R11 R12 R13 R14 R15 R16 R17 R18 R19 R20 R21 R22 R23 R24 R25 R26 R27 R28 R29 R30 R31 R32 R33 R34 R35 R36 R37 R38 R39 R40 R41 R42 R43 R44 R45 R46 R47 R48 R49 R50 R51 R52 R53 R54 R55: library part RES, "Resistor"
S1 S2: "Switch", LatestRevisionDate=17-Jul-2002, LatestRevisionNote="Re-released for DXP Platform.", PackageDescription="Switch; 2 Leads", PackageReference=SPST-2, Published=24-Mar-1999, Publisher="Altium Limited"
SEGMENT1: library part 7SEG_6DIGIT
T1: "Transformer"
U1: library part "IC BS66F340C", "Enhanced Touch A/D Flash MCU, 28-Pin"
U2: library part "IC TNY274", "AC to DC Switching Converter Off-Line Switcher 140kHz, 7-Pin"
U3: library part "OPTO COPLER", "4-Pin Phototransistor Optocoupler", DatasheetVersion=Nov-2003, LatestRevisionDate=04-Mar-2005, LatestRevisionNote="Sch pins 3 & 4 Swapped.", PackageReference=DIP-4, Published=24-Mar-1999, Publisher="Altium Limited"
U4: library part "VOLT REG", "Voltage Regulator", LatestRevisionDate=29-May-2009, LatestRevisionNote="IPC-7351 Footprint Added.", PackageDescription="3-Pin Transistor Outline Package 2.54 mm Pitch, 15.1 mm Lead Span", PackageReference=D2PAK, Published=24-Mar-1999, Publisher="Altium Limited"
VR1: library part VDR, "Typical VDR"

## Via types
v1: diameter 40, hole 19.68, Top Layer to Bottom Layer, 73 vias

## Nets (pads, with @x,y where several pads share a name; then routed paths per layer and width w, separated by ;. In a path a pad name is that pad's centre, name@x,y a point inside that pad or via, vN(x,y) a via of type N, cw(c..) or ccw(c..) an arc to the next point about the centre after c; other vN are vias at no path point)
BIAS: C13.1 D16.2 R50.1 | length 328.1
  Bottom Layer w40: C13.1@1035.93,1643.75 C13.1@1039.84,1647.66 ; R50.1@1098.75,1768.75 1098.75,1706.57 C13.1@1039.84,1647.66 ; 1199.75,1606.25 1081.25,1606.25 C13.1@1039.84,1647.66
BP/M: C14.1 D20.1 R51.2 U2.2 | length 406
  Bottom Layer w40: D20.1@1102.25,1862.5 1092.5,1872.25 R51.2@1092.5,1956.25 1051.25,1997.5 C14.1@1051.25,2143.75 U2.2@1154.83,2143.75
DCLINK+: C4.2 C7.1 D12.2 D13.2 R40.2 R41.2 R42.2 R43.2 R47.2 R52.2 T1.1 | length 3774.7
  Bottom Layer w30: 1557.95,3079.55 1654.65,2982.85 1654.65,2294.1 R52.2@1725,2223.75
  Bottom Layer w60: D13.2@140.95,1888 D12.2@140.95,2056.25 140.95,2237.5 140.95,2375.05 184.65,2418.75 C7.1@273.72,2418.75 C7.1@273.4,2419.08 ; C7.1@272.15,2420.32 C7.1@273.4,2419.08 ; 668.75,3028.75 1434.65,3028.75 1438.4,3028.75 ; 759.65,3028.75 759.65,3029 358.9,3029 272.15,2942.24 R43.2@272.15,2868.75 R42.2@272.15,2762.5 R41.2@272.15,2656.25 272.15,2551.25 R40.2@273.4,2550 C7.1@273.4,2419.08 ; T1.1@1434.65,2956.25 1434.65,3025 1438.4,3028.75 ; C4.2@1590.9,3243.75 1590.9,3112.5 1557.95,3079.55 1507.15,3028.75 1438.4,3028.75
DCLINK-: C7.2 C13.2 C14.2 C15.2 D18.1 D19.1 R48.1 T1.2 U2.5 U2.6 U2.7 U2.8 U3.3 | length 4329.5
  Top Layer w40: 856.25,1963.75 v1(1381.25,1963.75) 1412.5,1963.75 ; v1@1381.25,1954.38 v1@1381.25,1973.12
  Top Layer w80: v1(468.66,1781.25) 468.66,1999.91 481.25,2012.5 v1(856.25,2012.5) 856.25,2534.1 1081.55,2759.4 v1(1197.15,2759.4) v1(1234.65,2759.4) T1.2@1434.65,2759.4 ; v1(856.25,1887.5) 856.25,1963.75
  Bottom Layer w40: U2.7@856.25,2143.75 C14.2@961.25,2143.75 ; v1@1381.25,1954.38 v1(1381.25,1963.75) ; v1@1381.25,1973.12 v1(1381.25,1963.75) ; U3.3@1634.65,1931.25 1512.5,1931.25 1480,1963.75 v1(1381.25,1963.75)
  Bottom Layer w60: v1(468.66,1781.25) D18.1@468.66,1880.75 ; C7.2@470.57,2418.75 569.65,2319.68 R48.1@569.65,2237.5 U2.6@856.25,2237.5
  Bottom Layer w70: U2.7@856.25,2143.75 856.25,2237.5 U2.5@856.25,2343.75
  Bottom Layer w80: U2.8@854.83,2043.75 856.25,2042.33 v1(856.25,2012.5) v1(856.25,1887.5) 856.25,1723.43 C13.2@935.93,1643.75 ; v1@1193.75,2759.4 v1(1197.15,2759.4) v1(1234.65,2759.4) T1.2@1434.65,2759.4
DRAIN: D17.1 T1.3 U2.4 | length 539.3
  Bottom Layer w75: U2.4@1150,2343.75 1150,2550 D17.1@1128.4,2550 1140.95,2562.55 T1.3@1434.65,2562.55
EN/UV: C15.1 R54.1 U2.1 U3.4 | length 745.6
  Bottom Layer w25: U2.1@1154.83,2043.75 1160,2038.58 1160,1983.75 1180,1963.75 1295.53,1963.75 1323.75,1935.53 1323.75,1870 1362.5,1831.25 U3.4@1634.65,1831.25 ; C15.1@1562.5,1818.75 1580,1801.25 R54.1@1580,1718.75